# Altium PCB PCB1.PcbDoc
Units mil, origin at the board's own origin, x right, y up, seen from the top; angles counter-clockwise.
Board outline 2205.84 x 1746.52 mil, 2 copper layers (Top Layer, Bottom Layer); 30 components, 12 nets, 72 pads, 255 vias.
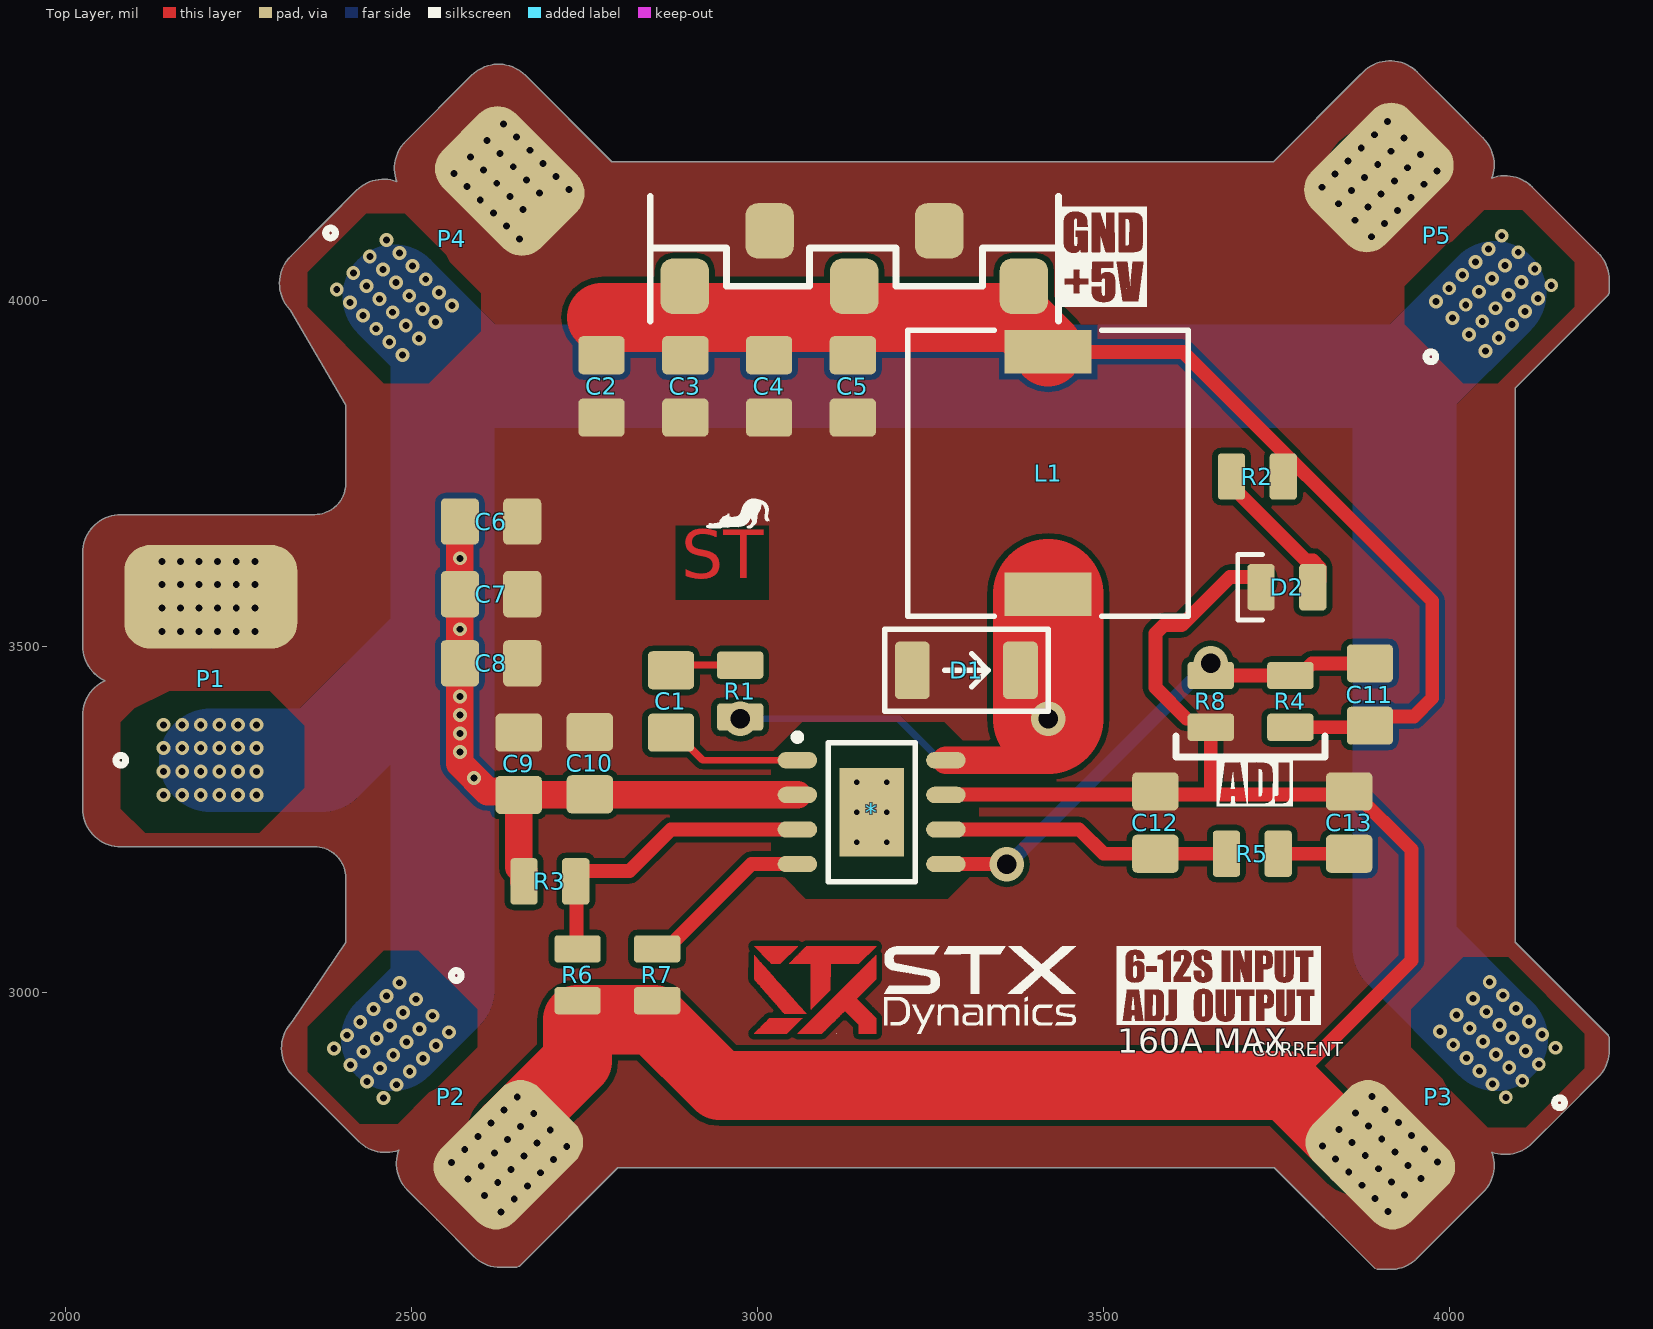
[diagram p0: Top Layer view]
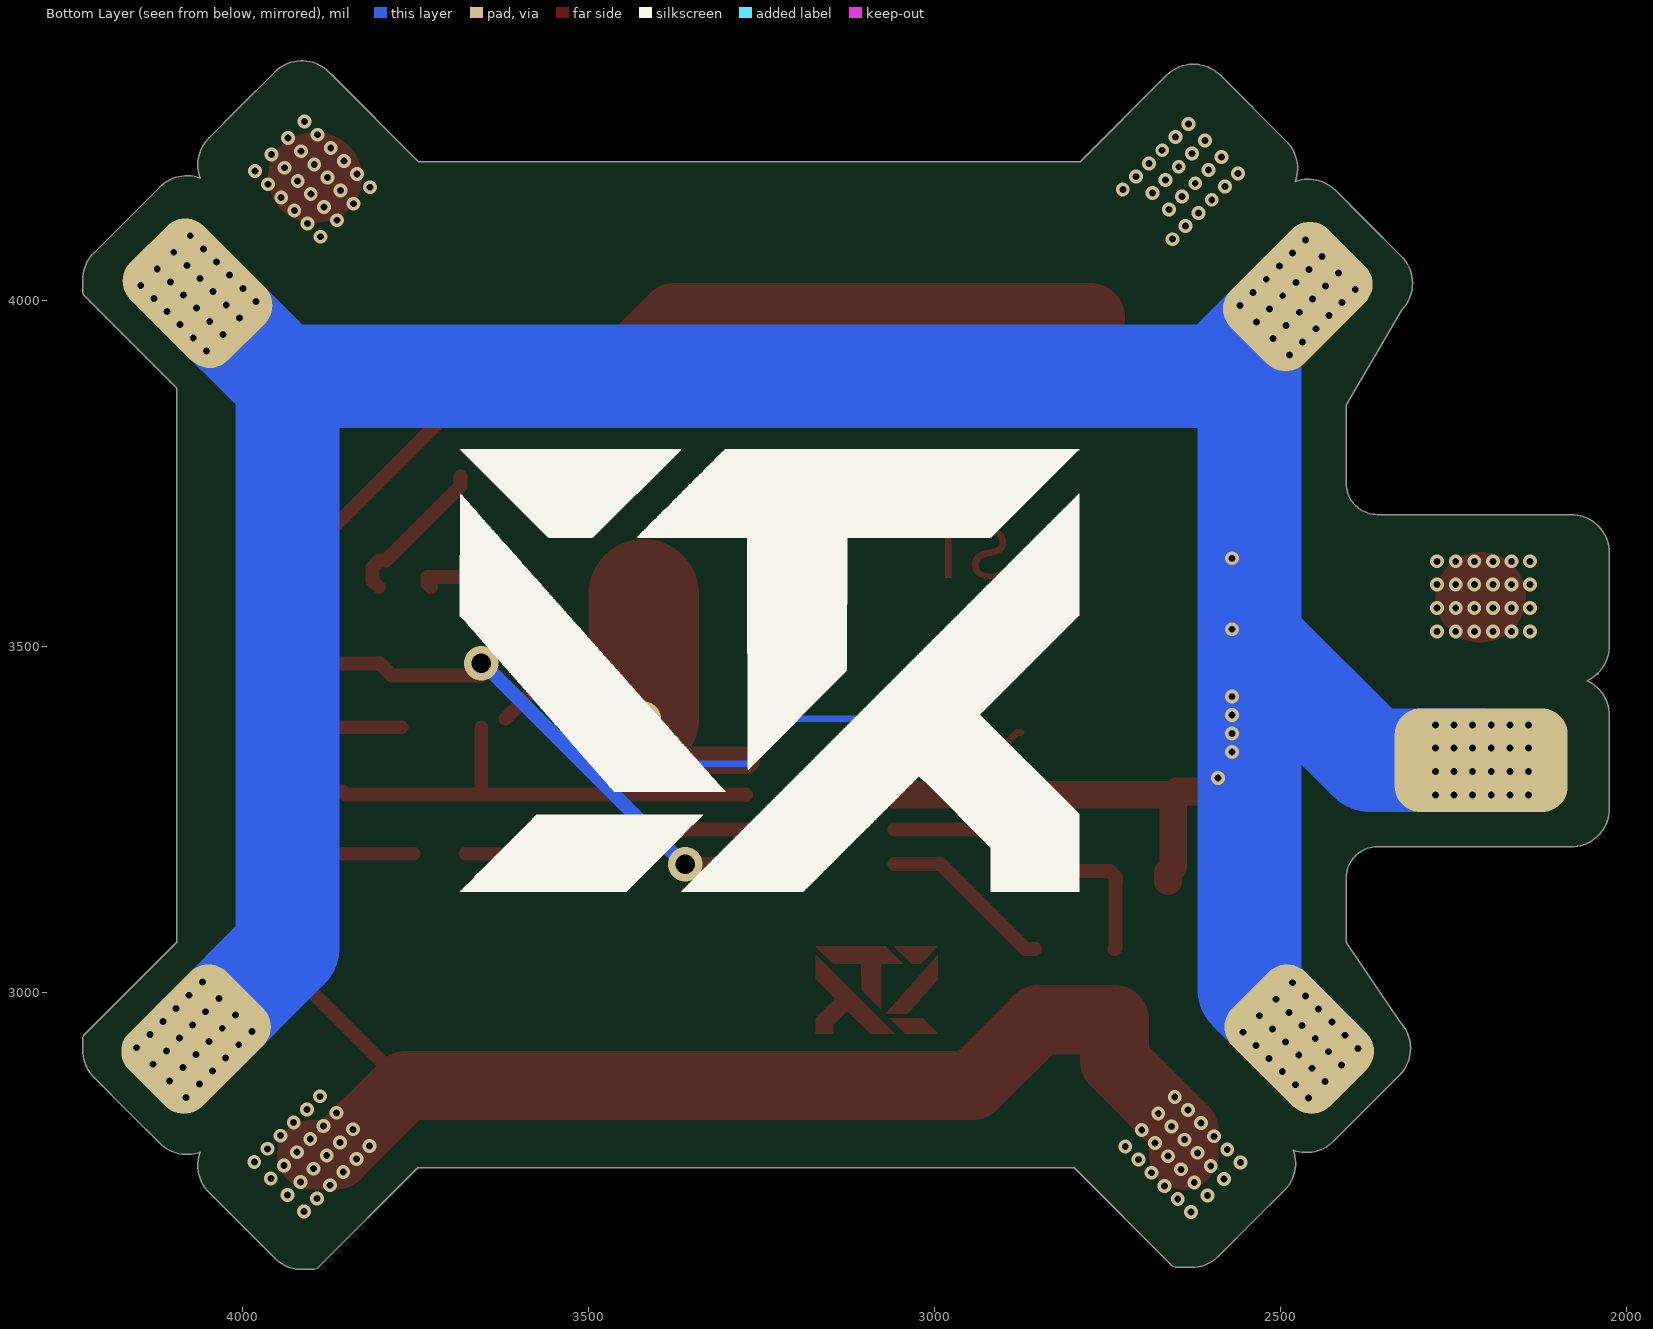
[diagram p1: Bottom Layer view, seen from below]
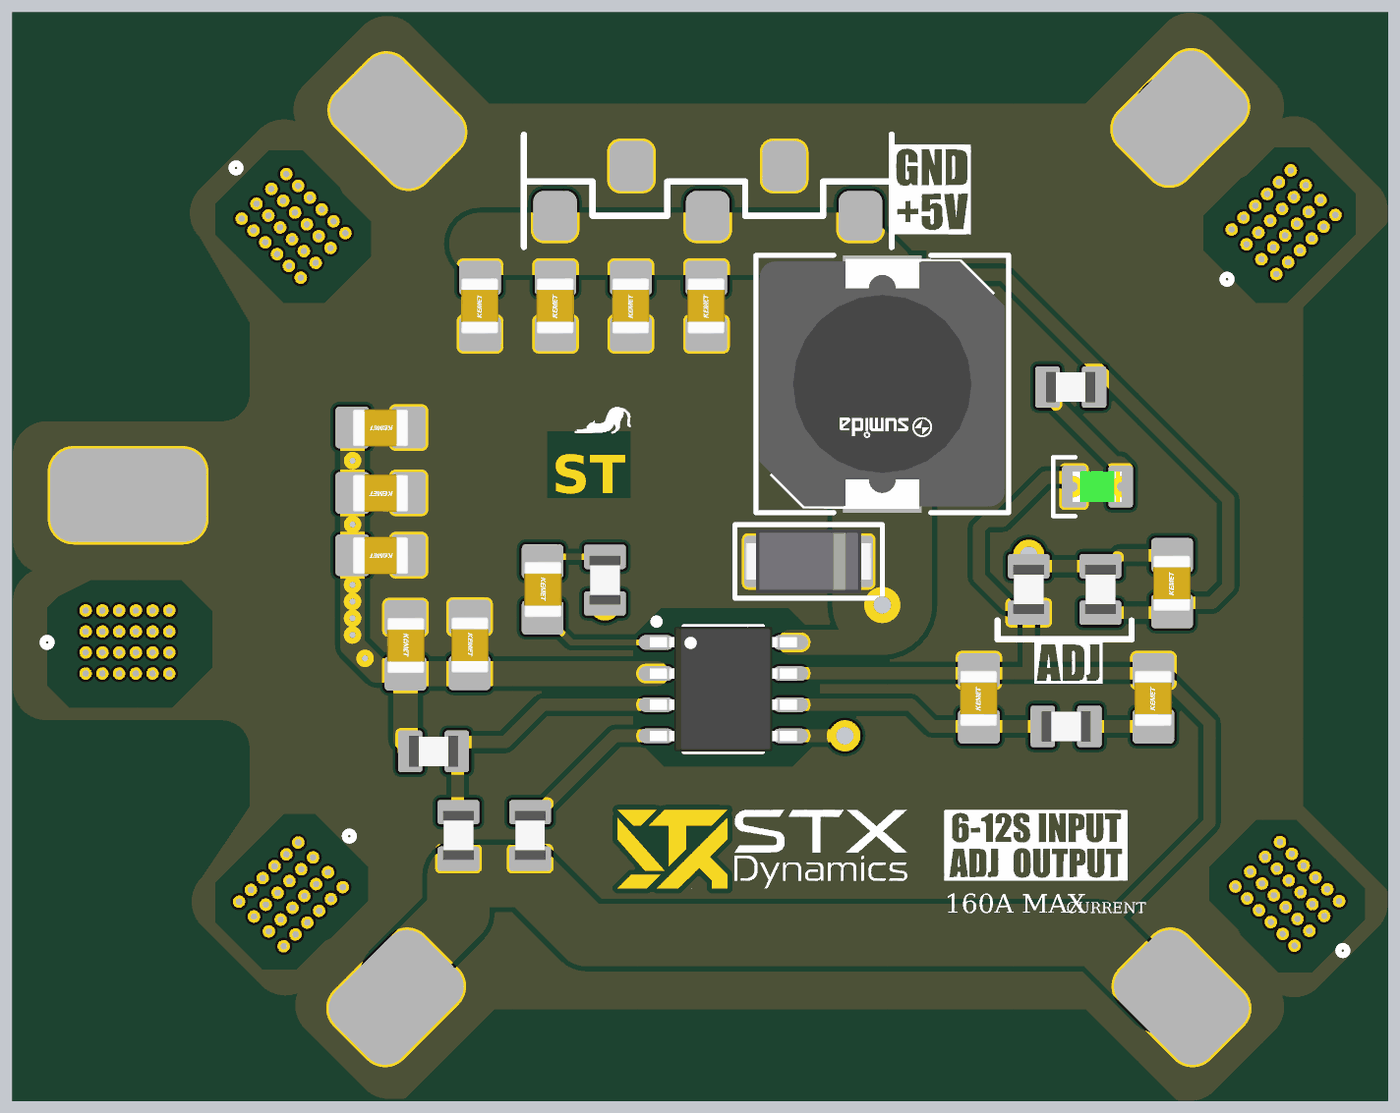
[diagram p2: 3D render of the assembled board from above, using the file's embedded part models]

## Layer stack, top to bottom
Top Solder: solder mask 0.4, Solder Resist, Dk 3.5
Top Layer: signal copper 1.4
Dielectric 1: dielectric 12.6, FR-4, Dk 4.8
Bottom Layer: signal copper 1.4
Bottom Solder: solder mask 0.4, Solder Resist, Dk 3.5

## Board outline
2328.21,2879.84 cw(c2367.11,2918.74) 2327.87,2957.3 2404.99,3071.53 2404.99,3165 ccw(c2360,3165) 2360,3209.99 2080,3209.99 cw(c2080,3265) 2024.98,3265 2024.98,3400 cw(c2080,3400) 2057.05,3450 cw(c2080,3500) 2024.98,3500 2024.98,3635 cw(c2080,3635) 2080,3690.01 2360,3690.01 ccw(c2360,3735) 2404.99,3735 2404.99,3848.64 2324.82,3985.75 cw(c2364.19,4024.19) 2325.28,4063.09 2378.33,4116.14 2420.74,4158.55 cw(c2459.64,4119.64) 2478.77,4171.23 cw(c2530.36,4190.35) 2491.45,4229.26 2586.91,4324.72 cw(c2625.81,4285.81) 2664.72,4324.72 2789.42,4200.02 3745.58,4200.02 3870.28,4324.72 3875.28,4329.72 cw(c3914.19,4290.81) 3953.09,4329.72 4006.14,4276.67 4048.55,4234.26 cw(c4009.64,4195.36) 4064.66,4195.36 cw(c4009.65,4195.35) 4061.23,4176.23 cw(c4080.36,4124.64) 4119.26,4163.55 4214.72,4068.09 cw(c4175.81,4029.19) 4230.83,4029.19 4230.83,4010.81 4229.36,4007.27 4095.01,3872.92 4095.01,3072.08 4229.36,2937.73 4230.83,2934.19 4230.83,2915.81 cw(c4175.82,2915.81) 4214.72,2876.91 4161.67,2823.86 4119.26,2781.45 cw(c4080.36,2820.36) 4061.23,2768.77 cw(c4009.64,2749.64) 4064.66,2749.64 cw(c4009.65,2749.64) 4048.55,2710.74 3953.09,2615.28 cw(c3914.19,2654.18) 3914.08,2599.17 3895.81,2599.17 3892.27,2600.64 3746.85,2746.06 2798.15,2746.06 2655.66,2603.57 2652.11,2602.1 2628.65,2602.1 2628.54,2602.1 cw(c2628.74,2657.11) 2589.84,2618.21 2536.79,2671.26 2494.38,2713.67 cw(c2533.28,2752.57) 2481.7,2771.7 cw(c2462.57,2823.28) 2423.67,2784.38

## Design rules (kind name [scope] priority, off if disabled: settings)
Clearance Şiar [All] p1: gap=7.87 ignorepadtopadclearanceinfootprint=FALSE except(0: Arc-Hole Track-Hole SMDPad-Hole THPad-Hole Via-Hole Fill-Hole Poly-Hole Region-Hole Text-Hole)
PolygonConnect [All] p1: connectstyle=Direct reliefconductorwidth=40 reliefentries=4 polygonreliefangle="90 Angle" airgapwidth=10
RoutingVias [All] p1: holewidth=11.81 width=23.62 viastyle="Through Hole" minholewidth=9.84 minwidth=19.68 maxholewidth=98.43 maxwidth=196.85
SolderMaskExpansion [All] p1: expansion=4 istentingtop=FALSE
SupplyNets "Schematic Supply Nets_2" [InNet('V_IN')] p1: voltage=0.000
SupplyNets "Schematic Supply Nets_1" [InNet('GND')] p2: voltage=0.000
SupplyNets "Schematic Supply Nets" [InNet('+5V')] p3: voltage=0.000
Width [All] p1: maxlimit=393.7 minlimit=3.94 preferedwidth=11.81 minimp=50.000000 maximp=50.000000 favimp=50.000000
30 further rules are at their usual default settings.

## Components (designator, comment, footprint, x,y, rotation, side; value= is the part's Value field where it differs from the comment)
* "SCT2650STER" SCT2650STER 3165,3260 r0 top
C1 "0uF1" CAP_0805 2875,3420 r270 top
C2 "47uF" CAP_0805 2774.64,3875.25 r90 top
C3 "47uF" CAP_0805 2895.69,3875.25 r90 top
C4 "47uF" CAP_0805 3016.73,3875.25 r90 top
C5 "47uF" CAP_0805 3137.78,3875.25 r90 top
C6 "4uF7" CAP_0805 2615,3680 r180 top
C7 "4uF7" CAP_0805 2615,3575 r180 top
C8 "4uF7" CAP_0805 2615,3475 r180 top
C9 "4uF7" CAP_0805 2655,3330 r270 top
C10 "0uF1" CAP_0805 2757.78,3330.8 r270 top
C11 "4uF7" CAP_0805 3885,3430 r90 top
C12 "22pF" CAP_0805 3575,3245 r90 top
C13 "3nF3" CAP_0805 3855,3245 r90 top
D1 "60V_5A" "DO-214AC-2 (SMA)" 3301.85,3465 r0 top
D2 "GREEN" LED_0805_GREEN 3765,3585 r0 top
L1 "8uH2" FP-CDRH104R-MFG 3420,3750 r180 top
P1 "POWER_CONN" POWER_CONN#1 2210,3335 r90 top
P2 "POWER_CONN" POWER_CONN#2 2472.97,2932.03 r315 top
P3 "POWER_CONN" POWER_CONN#2 4067.03,2932.03 r225 top
P4 "POWER_CONN" POWER_CONN#2 2475,4005 r45 top
P5 "POWER_CONN" POWER_CONN#2 4065,4010 r135 top
R1 "0" RES_0805 2975,3435 r90 top
R2 "820" RES_0805 3722.4,3745 r0 top
R3 "309k" RES_0805 2700,3160 r180 top
R4 "53k6" RES_0805 3770,3420 r270 top
R5 "33k2" RES_0805 3715,3200 r180 top
R6 "76k8" RES_0805 2740,3025 r90 top
R7 "200k" RES_0805 2855,3025 r90 top
R8 "10k2" RES_0805 3655,3420 r90 top

## Footprints (in the part's own frame and the unit in brackets; to place one, negate y for a bottom-side part, rotate by r counter-clockwise, add the part's x,y. Pads: shape width x height; smd on the part's side, far side on the other; paste and mask are expansions set on the pad)
CAP_0805 [mm]
  rrect25% 1.4x1.7 smd: 1(-1.143,0) 2(1.143,0)
  body extent -1.15,-0.76 1.15,0.79, height 1.01
"DO-214AC-2 (SMA)" [mm]
  rrect25% 1.27x2.1 smd: A(-1.985,0) K(1.985,0)
  silkscreen extent -3,-1.5 3,1.5, body extent -2.6,-1.3 2.6,1.3, height 2.42
FP-CDRH104R-MFG [mm]
  rect 3.2x1.6 smd paste+0 mask+0: 1(0,4.45) 2(0,-4.45)
  silkscreen extent -5.15,-5.25 5.15,5.25, body extent -5.25,-5.35 5.25,5.35, height 0.25
LED_0805_GREEN [mm]
  rrect25% 1x1.7 smd: A(0.95,0) K(-0.95,0)
  silkscreen extent -1.8,-1.2 -0.9,1.2, body extent -1,-0.63 1,0.63, height 1.12
POWER_CONN#1 [mm] "Power Connector"
  rrect50% 3.81x6.35 smd far side: 0(0,0)
  rrect50% 3.81x6.35 smd: 1(6,0)
  silkscreen extent -0.18,3.12 0.18,3.48
POWER_CONN#2 [mm] "Power Connector"
  rrect50% 3.81x5.08 smd far side: 0(0,0)
  rrect50% 3.81x5.08 smd: 1(6,0)
  silkscreen extent -0.18,3.12 0.18,3.48
RES_0805 [mm]
  rrect25% 1x1.7 smd: 1(-0.95,0) 2(0.95,0)
  body extent -1,-0.63 1,0.63, height 0.47
SCT2650STER [mm] "4.5V-60V Vin,5A, High Efficiency Step-down DCDC Converter with Programmable Frequency"
  oval 1.45x0.6 smd: 1(-2.725,1.905) 2(-2.725,0.635) 3(-2.725,-0.635) 4(-2.725,-1.905) 5(2.725,-1.905) 6(2.725,-0.635) 7(2.725,0.635) 8(2.725,1.905)
  rect 2.36x3.25 smd: 9(0,0)
  silkscreen extent -2.85,-2.55 1.6,2.88, body extent -3,-2.55 3,2.55, height 1.6

## Part data
C1 C2 C3 C4 C5 C6 C7 C8 C9 C10 C11 C12 C13: library part CAP_0805, "Capacitor SMD 0805"
D1: library part D_SCHOTTKY_SMA, "Diode Schottky SMD SMA (DO-214AA)"
D2: library part LED_0805_GREEN, "LED 0805 GREEN SMD"
L1: library part CMP-48855-000006-1, "FIXED IND 5.2UH 6A 22 MOHM SMD", Case/Package=Nonstandard, Current Rating=5.4A, DC Resistance (DCR)=22mR, Inductance=5.2uH, Max Operating Temperature=100°C, Min Operating Temperature=-40°C, Package Quantity=1, Rated Current-Max=5.5A, Saturation Current=5.6A, Test Frequency=100kHz, Tolerance=30%, Core Material=Ferrite, DC Current=5.4A, Depth=10.3mm, Height=4mm, Height - Seated (Max)=0.157inch, Lead Free="Lead Free", Length=10.5mm, Max DC Current=5.4A, Military Standard=Not, Mount="Surface Mount", Packaging="Tape and Reel", Radiation Hardening=No, Series=CDRH, Shielding=Shielded, Termination=SMD/SMT, Width=0.394inch
P1 P2 P3 P4 P5: "Li-on Battery Power Connector"
R1 R2 R3 R4 R5 R6 R7 R8: library part RES_0805, "Resistor SMD 0805"

## Free pads (board coordinates)
  rrect50% 70x80 smd: 6(3140,4020) 6(3385,4020) 7(2895,4020) 7(3017.5,4100) 7(3262.5,4100)

## Via types
v1: diameter 20, hole 10, Top Layer to Bottom Layer, 245 vias
v2: diameter 19.68, hole 7.87, Top Layer to Bottom Layer, 6 vias
v3: diameter 50, hole 28, Top Layer to Bottom Layer, 4 vias

## Nets (pads, with @x,y where several pads share a name; then routed paths per layer and width w, separated by ;. In a path a pad name is that pad's centre, name@x,y a point inside that pad or via, vN(x,y) a via of type N, cw(c..) or ccw(c..) an arc to the next point about the centre after c; other vN are vias at no path point)
+5V: C2.2 C3.2 C4.2 C5.2 C11.1 L1.2 pad.6 pad.7@2895,4020 R2.2 R4.2 | length 1735.6
  Top Layer w10: C11.1@3882.6,3382.6 C11.1
  Top Layer w20: L1.2 3614.8,3925.2 3975,3565 3975,3425 3948.46,3398.46 3898.46,3398.46 C11.1 ; R4.2 C11.1@3882.6,3382.6
  Top Layer w100: 2775,3975 3375.71,3975 3420,3930.71 L1.2
GND: *.7 C2.1 C3.1 C4.1 C5.1 C6.1 C7.1 C8.1 C9.1 C10.1 C12.2 C13.2 D1.A D2.K P1.1 P2.1 P3.1 P4.1 P5.1 pad.7@3017.5,4100 pad.7@3262.5,4100 R6.1 R7.1 R8.1 | length 3057.9
  Top Layer w20: *.7 3272.98,3285.69 3655,3285.69 ; 3620,3395 3575,3440 3575,3518.28 3586.72,3530 3612.6,3530 3682.6,3600 3732.91,3600 3732.91,3590.31 D2.K ; R8.1 3655,3285.69 ; 3764.64,2865 3945,3045.36 3945,3205.91 3860.91,3290 C13.2 3850.69,3285.69 3655,3285.69
  Top Layer w100: P2.1 2640,2800.36 2740,2900.36 2740,2960 2850,2960 2945,2865 3764.64,2865 3864.64,2765 P3.1
  Top Layer w130: P1.1 P1.1@2211.22,3570 ; P5.1@3892.03,4177.03 P5.1
  other v1: 2629.57,2682.09 3911.31,2682.98 2648.54,2701.07 3892.34,2701.95 2605.71,2705.96 3935.18,2706.84 2667.52,2720.04 3873.37,2720.92 2624.68,2724.93 3916.2,2725.81 2581.84,2729.82 3959.04,2730.71 2686.49,2739.01 3854.39,2739.9 2643.65,2743.9 3897.23,2744.79 2600.81,2748.8 3940.07,2749.68 2557.98,2753.69 3982.91,2754.57 2705.47,2757.99 3835.42,2758.87 2662.63,2762.88 3878.26,2763.76 2619.79,2767.77 3921.1,2768.65 2576.95,2772.66 3963.93,2773.54 2724.44,2776.96 3816.44,2777.85 2681.6,2781.85 3859.28,2782.74 2638.76,2786.74 3902.12,2787.63 2595.92,2791.63 3944.96,2792.52 2700.58,2800.83 3840.31,2801.71 2657.74,2805.72 3883.15,2806.6 2614.9,2810.61 3925.99,2811.49 2676.71,2824.69 3864.17,2825.58 2633.87,2829.58 3907.01,2830.47 2652.85,2848.56 3888.04,2849.44 2139.5,3521.25 2166.33,3521.25 2193.17,3521.25 2220,3521.25 2246.83,3521.25 2273.67,3521.25 2139.5,3555 2166.33,3555 2193.17,3555 2220,3555 2246.83,3555 2273.67,3555 2139.5,3588.75 2166.33,3588.75 2193.17,3588.75 2220,3588.75 2246.83,3588.75 2273.67,3588.75 2139.5,3622.5 2166.33,3622.5 2193.17,3622.5 2220,3622.5 2246.83,3622.5 2273.67,3622.5 2656.31,4087.98 3887.15,4091.44 2637.34,4106.95 3906.13,4110.42 3863.29,4115.31 2618.37,4125.92 3925.1,4129.39 2661.2,4130.81 3882.26,4134.28 3839.42,4139.17 2599.39,4144.9 3944.08,4148.37 2642.23,4149.79 3901.24,4153.26 2685.07,4154.68 3858.4,4158.15 2727.91,4159.57 3815.56,4163.04 2580.42,4163.87 3963.05,4167.34 2623.26,4168.76 3920.21,4172.23 2666.1,4173.65 3877.37,4177.12 2708.93,4178.54 3834.53,4182.01 2561.44,4182.85 3982.02,4186.31 2604.28,4187.74 3939.19,4191.2 2647.12,4192.63 3896.35,4196.1 2689.96,4197.52 3853.51,4200.99 2585.31,4206.71 3958.16,4210.18 2628.15,4211.6 3915.32,4215.07 2670.99,4216.49 3872.48,4219.96 2609.17,4230.58 3934.29,4234.04 2652.01,4235.47 3891.46,4238.93 2633.04,4254.44 3910.43,4257.91
Net*_1: *.1 C1.2 | length 199.3
  Top Layer w10: C1.2 2880.91,3375 2920.91,3335 *.1
Net*_3: *.3 R3.1 R6.2 | length 453.2
  Top Layer w20: R6.2 2738.7,3063.7 2738.7,3158.7 R3.1 2737.4,3165.31 2747.09,3175 2815,3175 2875,3235 *.3
Net*_4: *.4 R7.2 | length 253.5
  Top Layer w20: R7.2 2868.78,3062.4 2991.38,3185 *.4
Net*_5: *.5 C11.2 R4.1 R8.2 | length 757.7
  Top Layer w20: *.5 v3(3360,3185) ; v3(3655,3475) R8.2 R4.1 3783.78,3457.4 3801.38,3475 C11.2
  Bottom Layer w20: v3(3360,3185) 3362.5,3185 3652.5,3475 v3(3655,3475)
Net*_6: *.6 C12.1 R5.2 | length 419.8
  Top Layer w20: *.6 3465,3235 3500,3200 C12.1 R5.2
Net*_8: *.8 D1.K L1.1 R1.1 | length 829
  Top Layer w10: v3(2975,3395) R1.1
  Top Layer w40: *.8 3420,3335
  Top Layer w160: v3(3420,3395) L1.1
  Bottom Layer w10: v3(2975,3395) 3203.9,3395 3268.9,3330 3355,3330 v3(3420,3395)
NetC1_1: C1.1 R1.2 | length 103.1
  Top Layer w10: C1.1 2882.4,3472.4 R1.2
NetC13_1: C13.1 R5.1 | length 102.6
  Top Layer w20: R5.1 C13.1
NetD2_A: D2.A R2.1 | length 222.7
  Top Layer w20: R2.1 3685,3731.22 3792.76,3623.46 3802.72,3623.46 3812.4,3613.78 3812.09,3613.46 3812.09,3594.69 D2.A
V_IN: *.2 C6.2 C7.2 C8.2 C9.2 C10.2 P1.0 P2.0 P3.0 P4.0 P5.0 R3.2 | length 5124.8
  Top Layer w40: C6.2 C7.2 C8.2 2570,3330 2610,3290 2650,3290 C9.2 ; R3.2 2662.6,3173.15 2655,3180.75 C9.2 ; *.2 C9.2
  Bottom Layer w150: P1.0 2370,3335 2545,3510 ; P2.0 2545,3004.07 2545,3510 ; P4.0 P4.0@2545,3935 ; P5.0 3945,3890 3935,3890 ; P3.0 3935,3064.07 3935,3890 ; 2545,3510 P4.0@2545,3935 ; P4.0@2545,3935 2590,3890 3935,3890
  other v1: 2459.57,2847.09 4081.31,2847.98 2478.54,2866.07 4062.34,2866.95 2435.71,2870.96 4105.18,2871.84 2497.52,2885.04 4043.37,2885.92 2454.68,2889.93 4086.2,2890.81 2411.84,2894.82 4129.04,2895.71 2516.49,2904.01 4024.39,2904.9 2473.65,2908.9 4067.23,2909.79 2430.81,2913.8 4110.07,2914.68 2387.98,2918.69 4152.91,2919.57 2535.47,2922.99 4005.42,2923.87 2492.63,2927.88 4048.26,2928.76 2449.79,2932.77 4091.1,2933.65 2406.95,2937.66 4133.93,2938.54 2554.44,2941.96 3986.44,2942.85 2511.6,2946.85 4029.28,2947.74 2468.76,2951.74 4072.12,2952.63 2425.92,2956.63 4114.96,2957.52 2530.58,2965.83 4010.31,2966.71 2487.74,2970.72 4053.15,2971.6 2444.9,2975.61 4095.99,2976.49 2506.71,2989.69 4034.17,2990.58 2463.87,2994.58 4077.01,2995.47 2482.85,3013.56 4058.04,3014.44 2141.83,3285 2168.67,3285 2195.5,3285 2222.33,3285 2249.17,3285 2276,3285 2590.13,3309.34 2141.83,3318.75 2168.67,3318.75 2195.5,3318.75 2222.33,3318.75 2249.17,3318.75 2276,3318.75 2570,3346.83 2141.83,3352.5 2168.67,3352.5 2195.5,3352.5 2222.33,3352.5 2249.17,3352.5 2276,3352.5 2570,3373.67 2141.83,3386.25 2168.67,3386.25 2195.5,3386.25 2222.33,3386.25 2249.17,3386.25 2276,3386.25 2570,3400.5 2570,3427.33 2570.13,3524.34 2570.13,3626.84 2486.96,3920.56 4052.15,3926.44 2467.99,3939.53 2510.83,3944.42 4071.13,3945.42 4028.29,3950.31 2449.01,3958.51 2491.85,3963.4 4090.1,3964.39 2534.69,3968.29 4047.26,3969.28 4004.42,3974.17 2430.04,3977.48 2472.88,3982.37 4109.08,3983.37 2515.72,3987.26 4066.24,3988.26 2558.56,3992.15 4023.4,3993.15 2411.07,3996.46 3980.56,3998.04 2453.9,4001.35 4128.05,4002.34 2496.74,4006.24 4085.21,4007.23 2539.58,4011.13 4042.37,4012.12 2392.09,4015.43 3999.53,4017.01 2434.93,4020.32 4147.02,4021.31 2477.77,4025.21 4104.19,4026.2 2520.61,4030.1 4061.35,4031.1 4018.51,4035.99 2415.96,4039.29 2458.8,4044.19 4123.16,4045.18 2501.63,4049.08 4080.32,4050.07 4037.48,4054.96 2439.82,4063.16 2482.66,4068.05 4099.29,4069.04 4056.46,4073.93 2463.69,4087.02 4075.43,4092.91
pads on no net: *.9
copper on no net:
  other v2: 3143.35,3216.69 3186.65,3216.69 3143.35,3260 3186.65,3260 3143.35,3303.31 3186.65,3303.31

## Polygon pours and split planes (outlines as drawn)
GND on Top Layer "GND_L01_P001" (solid, pour order 1): 2328.21,2879.84 cw(c2367.11,2918.74) 2327.87,2957.3 2404.99,3071.53 2404.99,3165 ccw(c2360,3165) 2360,3209.99 2080,3209.99 cw(c2080,3265) 2024.98,3265 2024.98,3400 cw(c2080,3400) 2057.05,3450 cw(c2080,3500) 2024.98,3500 2024.98,3635 cw(c2080,3635) 2080,3690.01 2360,3690.01 ccw(c2360,3735) 2404.99,3735 2404.99,3848.64 2324.82,3985.75 cw(c2364.19,4024.19) 2325.28,4063.09 2378.33,4116.14 2420.74,4158.55 cw(c2459.64,4119.64) 2478.77,4171.23 cw(c2530.36,4190.35) 2491.45,4229.26 2586.91,4324.72 cw(c2625.81,4285.81) 2664.72,4324.72 2789.42,4200.02 3745.58,4200.02 3870.28,4324.72 3875.28,4329.72 cw(c3914.19,4290.81) 3953.09,4329.72 4006.14,4276.67 4048.55,4234.26 cw(c4009.64,4195.36) 4064.66,4195.36 cw(c4009.65,4195.35) 4061.23,4176.23 cw(c4080.36,4124.64) 4119.26,4163.55 4214.72,4068.09 cw(c4175.81,4029.19) 4230.83,4029.19 4230.83,4010.81 4229.36,4007.27 4095.01,3872.92 4095.01,3072.08 4229.36,2937.73 4230.83,2934.19 4230.83,2915.81 cw(c4175.82,2915.81) 4214.72,2876.91 4161.67,2823.86 4119.26,2781.45 cw(c4080.36,2820.36) 4061.23,2768.77 cw(c4009.64,2749.64) 4064.66,2749.64 cw(c4009.65,2749.64) 4048.55,2710.74 3953.09,2615.28 cw(c3914.19,2654.18) 3914.08,2599.17 3895.81,2599.17 3892.27,2600.64 3746.85,2746.06 2798.15,2746.06 2655.66,2603.57 2652.11,2602.1 2628.65,2602.1 2628.54,2602.1 cw(c2628.74,2657.11) 2589.84,2618.21 2536.79,2671.26 2494.38,2713.67 cw(c2533.28,2752.57) 2481.7,2771.7 cw(c2462.57,2823.28) 2423.67,2784.38

## Other copper
Top Layer:
  region: 3053.02,3066.22 3058.09,3066.19 3057.98,3065.93 3057.84,3065.86 3032.99,3041.02 3032.48,3040.94 3020.21,3041.02 3020.03,3041.13 3019.95,3041.27 3018.75,3042.48 3018.64,3042.51 3018.56,3042.66 3018.38,3042.84 3018.27,3042.88 3018.2,3043.02 3016.63,3044.6 3016.52,3044.63 3016.45,3044.78 2995.29,3065.93 2995.04,3066.04 2995.07,3066.22 3052.94,3066.22
  region: 534 vertices and 0 holes, not listed, extent 2995.04,2968.39 3070.73,3053.51
  region: 3058.86,2956.4 3042.6,2940.15 3042.57,2939.96 2995.04,2940 2995.07,2940.18 2995.44,2940.4 2999.06,2944.02 2999.13,2944.16 2999.27,2944.31 2999.35,2944.46 2999.6,2944.64 2999.75,2944.86 2999.9,2944.93 3000.01,2945.04 3000.08,2945.19 3000.33,2945.37 3000.55,2945.59 3000.7,2945.66 3004.54,2949.5 3004.61,2949.64 3004.9,2949.94 3004.97,2950.08 3005.23,2950.27 3005.38,2950.49 3005.52,2950.56 3005.67,2950.78 3005.81,2950.85 3006.11,2951.14 3006.25,2951.22 3010.09,2955.05 3010.16,2955.2 3010.53,2955.56 3010.6,2955.71 3010.82,2955.86 3010.89,2956 3011.18,2956.22 3011.26,2956.37 3011.51,2956.55 3011.66,2956.7 3011.81,2956.77 3015.64,2960.61 3015.71,2960.75 3015.9,2961.01 3016.04,2961.08 3016.19,2961.3 3016.34,2961.37 3016.45,2961.48 3016.52,2961.63 3016.77,2961.81 3016.92,2962.03 3064.34,2961.96 3064.38,2961.85 3064.12,2961.59 3063.98,2961.52 3058.9,2956.44
  region: 1080 vertices and 0 holes, not listed, extent 3058.24,2939.96 3171.79,3053.51
  region: 3085.75,3066.22 3171.71,3066.19 3171.6,3065.93 3171.46,3065.86 3146.61,3041.02 3146.1,3040.94 3105.73,3040.98 3105.51,3040.83 3105.44,3002.98 3077.53,2975.07 3077.46,2974.93 3077.35,2974.82 3077.13,2974.89 3077.05,3040.87 3076.69,3041.02 3076.47,3040.94 3045.64,3041.02 3045.6,3041.27 3045.85,3041.45 3046.07,3041.67 3046.18,3041.71 3046.26,3041.86 3046.8,3042.4 3046.95,3042.48 3047.1,3042.7 3047.24,3042.77 3047.43,3043.02 3048.49,3044.08 3048.63,3044.16 3048.74,3044.27 3048.81,3044.41 3049.95,3045.55 3050.09,3045.62 3050.24,3045.84 3050.39,3045.91 3050.75,3046.35 3051.63,3047.23 3051.77,3047.3 3051.88,3047.41 3051.96,3047.55 3053.09,3048.69 3053.23,3048.76 3053.38,3048.98 3053.53,3049.05 3053.71,3049.31 3054.84,3050.44 3054.99,3050.51 3055.17,3050.77 3056.3,3051.9 3056.41,3051.94 3056.49,3052.09 3056.6,3052.19 3056.71,3052.23 3056.78,3052.38 3057.98,3053.58 3058.13,3053.66 3058.31,3053.91 3059.45,3055.04 3059.59,3055.12 3059.74,3055.34 3059.85,3055.37 3059.92,3055.52 3061.13,3056.72 3061.27,3056.8 3061.45,3057.05 3062.59,3058.19 3062.73,3058.26 3062.88,3058.48 3063.03,3058.55 3063.21,3058.81 3064.27,3059.87 3064.41,3059.94 3064.6,3060.2 3065.73,3061.33 3065.88,3061.4 3066.02,3061.62 3066.17,3061.69 3066.35,3061.95 3067.48,3063.08 3067.63,3063.15 3067.81,3063.41 3068.87,3064.47 3069.02,3064.54 3069.16,3064.76 3069.31,3064.84 3069.49,3065.09 3070.26,3065.86 3070.41,3065.93 3070.51,3066.19 3085.68,3066.22
  text "ST" at 2890,3575 h120
Multi-Layer:
  pour cut-out: 2150,3435 2295,3435 2345,3385 2345,3295 2280,3230 2115,3230 2080,3265 2080,3390 2100,3410
  pour cut-out: 4005,4085 4050,4130 4105,4130 4180,4055 4180,3990 4070,3880 4020,3880 3935,3965 3935,4020 3995,4080
  pour cut-out: 2555,4055 2600,4010 2600,3955 2525,3880 2460,3880 2350,3990 2350,4040 2435,4125 2490,4125 2550,4065
  pour cut-out: 2525,2855 2480,2810 2425,2810 2350,2885 2350,2950 2460,3060 2510,3060 2595,2975 2595,2920 2535,2860
  pour cut-out: 3990,2875 3945,2920 3945,2975 4020,3050 4085,3050 4195,2940 4195,2890 4110,2805 4055,2805 3995,2865
  pour cut-out: 3020,3273.24 3070,3135 3275,3135 3320,3180 3320,3340 3270,3390 3065,3390 3020,3345 3020,3185 3070,3135

## Silkscreen, mask and mechanical layers (free items; w line width, h text height)
Top Overlay:
  drawing of 42 lines, arcs and shapes, not listed
  text "160A MAX" at 3520,2900.72 h60
  text "CURRENT" at 3715,2900.47 h34
Bottom Overlay:
  drawing of 5 lines, arcs and shapes, not listed
Top Solder:
  drawing of 5 lines, arcs and shapes, not listed
  text "ST" at 2890,3575 h120
Mechanical 1:
  lines w10: 2509.14,4140.86 2495,4155 ; 2512.07,2802.07 2497.93,2787.93 ; 3873.83,4321.17 3747.66,4195 2787.34,4195 2661.17,4321.17 ccw(c2625.81,4285.81) 2590.46,4321.17 2495,4225.71 ccw(c2530.36,4190.36) 2495,4155 ; 3878.83,4326.17 cw(c3914.19,4290.81) 3949.54,4326.17 4002.57,4273.14 4045,4230.71 cw(c4009.64,4195.36) 4045,4160 ; 4030.86,2799.14 4045,2785 ; 4030.86,4145.86 4045,4160 ; 2080,3450 cw(c2080,3500) 2030,3500 2030,3635 cw(c2080,3635) 2080,3685 2360,3685 ccw(c2360,3735) 2410,3735 2410,3850 2328.83,3988.83 cw(c2364.19,4024.19) 2328.83,4059.54 2381.86,4112.57 2424.29,4155 cw(c2459.64,4119.64) 2495,4155 ; 2080,3450 ccw(c2080,3400) 2030,3400 2030,3340 2030,3265 ccw(c2080,3265) 2080,3215 2360,3215 cw(c2360,3165) 2410,3165 2410,3070 2331.76,2954.1 ccw(c2367.11,2918.74) 2331.76,2883.39 2427.22,2787.93 ccw(c2462.57,2823.28) 2497.93,2787.93 ; 2080,3450 2100,3450 2080,3450 ; 2497.93,2787.93 ccw(c2533.28,2752.57) 2497.93,2717.22 2540.36,2674.79 2593.39,2621.76 ccw(c2628.74,2657.11) 2628.65,2607.11 ; 2628.65,2607.11 2628.65,2607.11 ; 2628.65,2607.11 2629.56,2607.11 2652.11,2607.11 2796.07,2751.07 3748.93,2751.07 3895.81,2604.19 3914.09,2604.19 ccw(c3914.19,2654.19) 3949.54,2618.83 4045,2714.29 ccw(c4009.64,2749.64) 4045,2785 ; 4045,2785 ccw(c4080.36,2820.36) 4115.71,2785 4158.14,2827.43 4211.17,2880.46 ccw(c4175.81,2915.81) 4225.81,2915.81 4225.81,2934.19 4090,3070 4090,3875 4225.81,4010.81 4225.81,4029.19 ccw(c4175.81,4029.19) 4211.17,4064.54 4115.71,4160 ccw(c4080.36,4124.64) 4045,4160

## Text inside footprints (layer, text, board x,y; h text height)
D2: Mechanical 13 "+" at 3834.56,3624.38 h39.37